# Altium PCB dAir-clove-0.0.0.2.PcbDoc
Units mm, origin at the board's own origin, x right, y up, seen from the top; angles counter-clockwise.
Board outline 78 x 78 mm, 2 copper layers (Top Layer, Bottom Layer); 72 components, 41 nets, 254 pads, 61 vias.
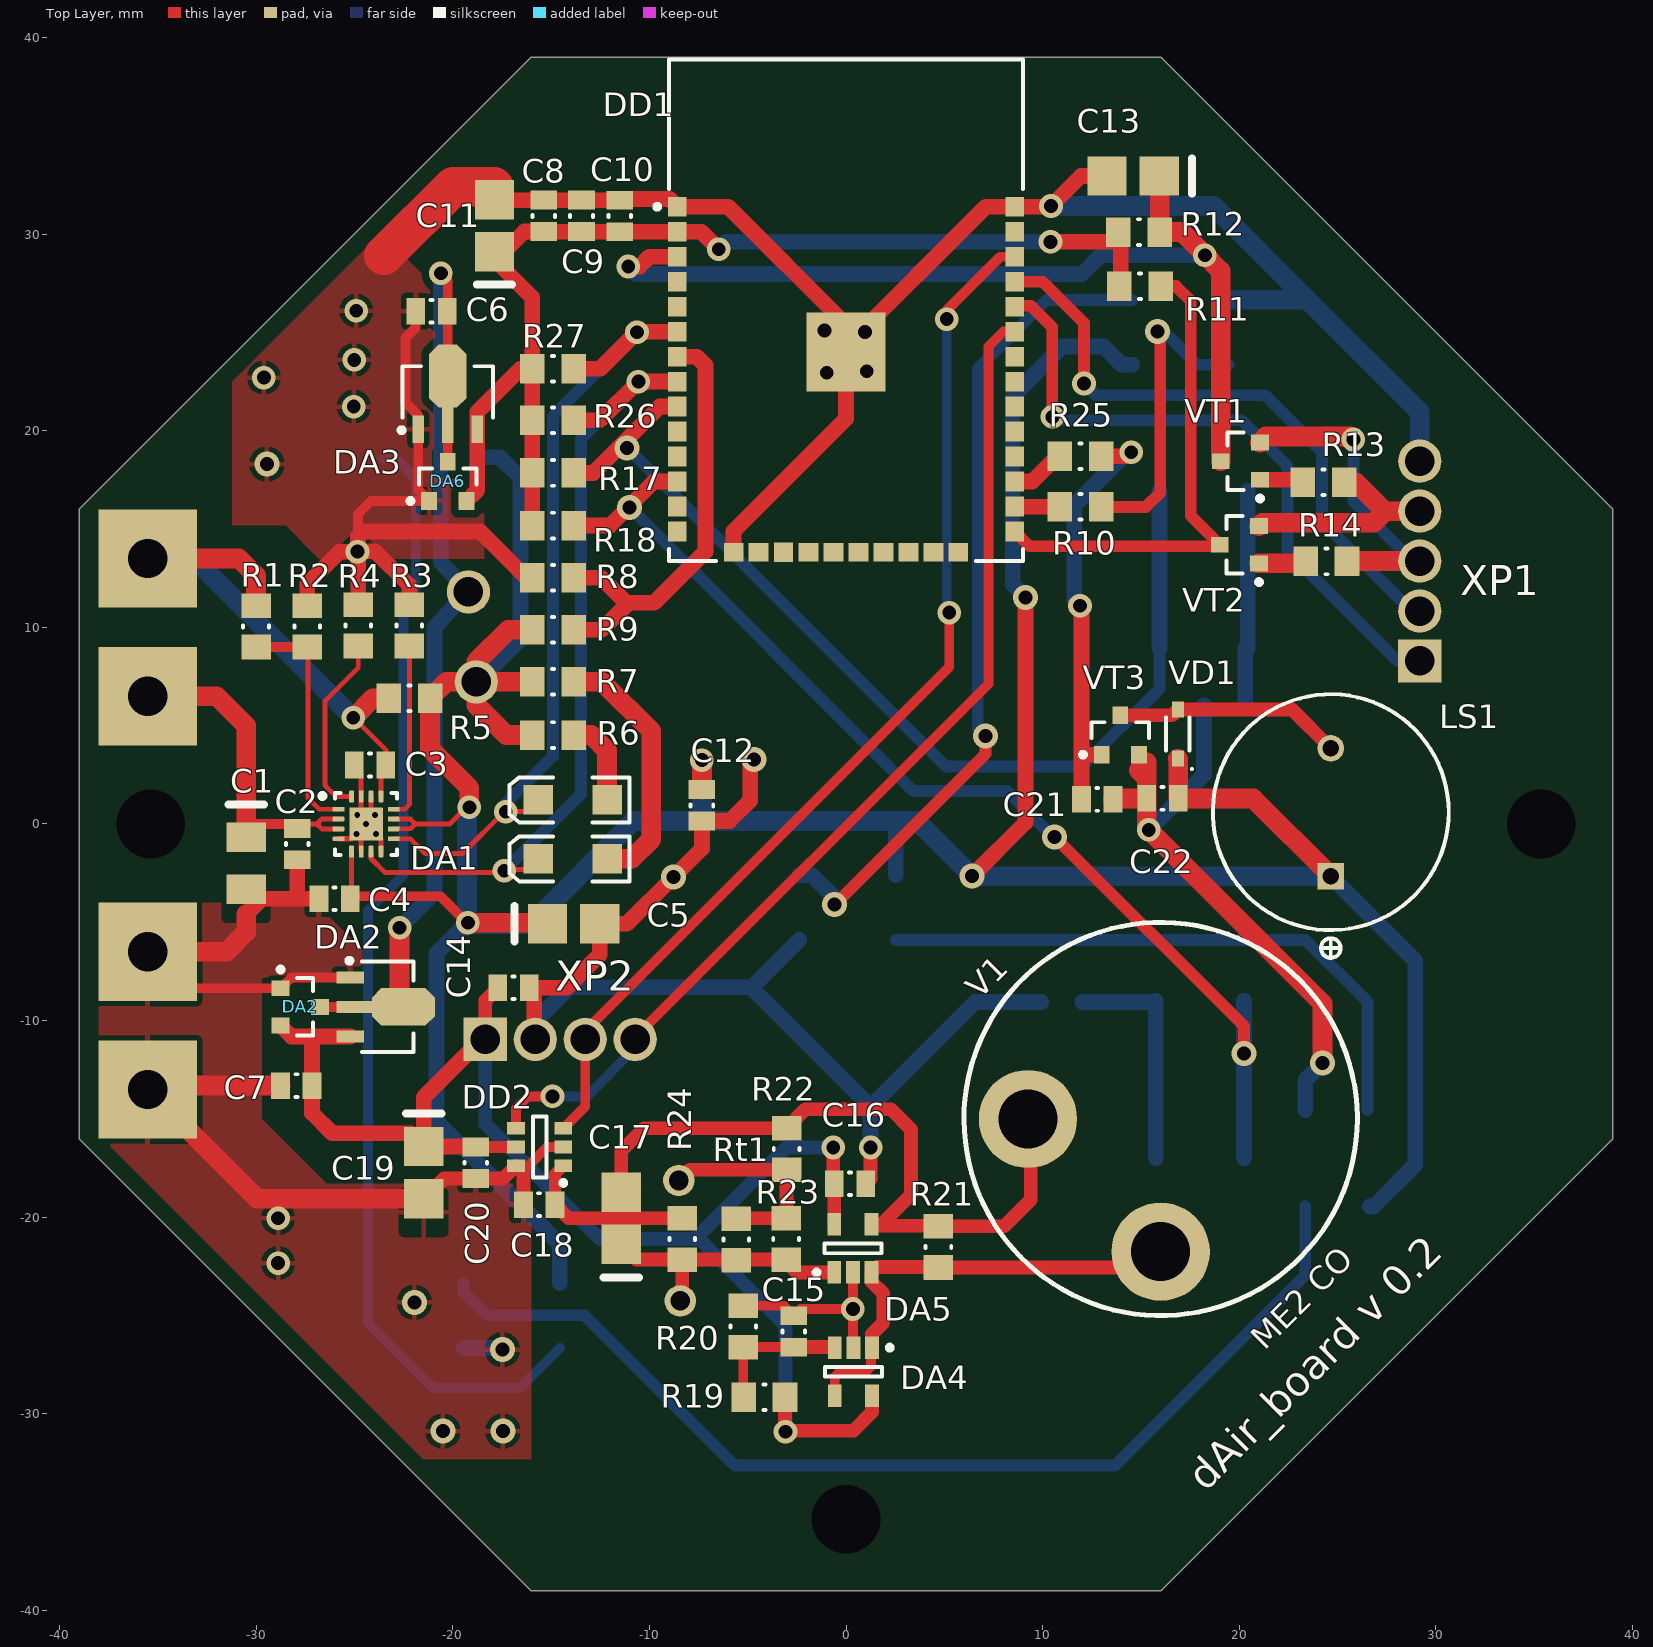
[diagram p0: Top Layer view]
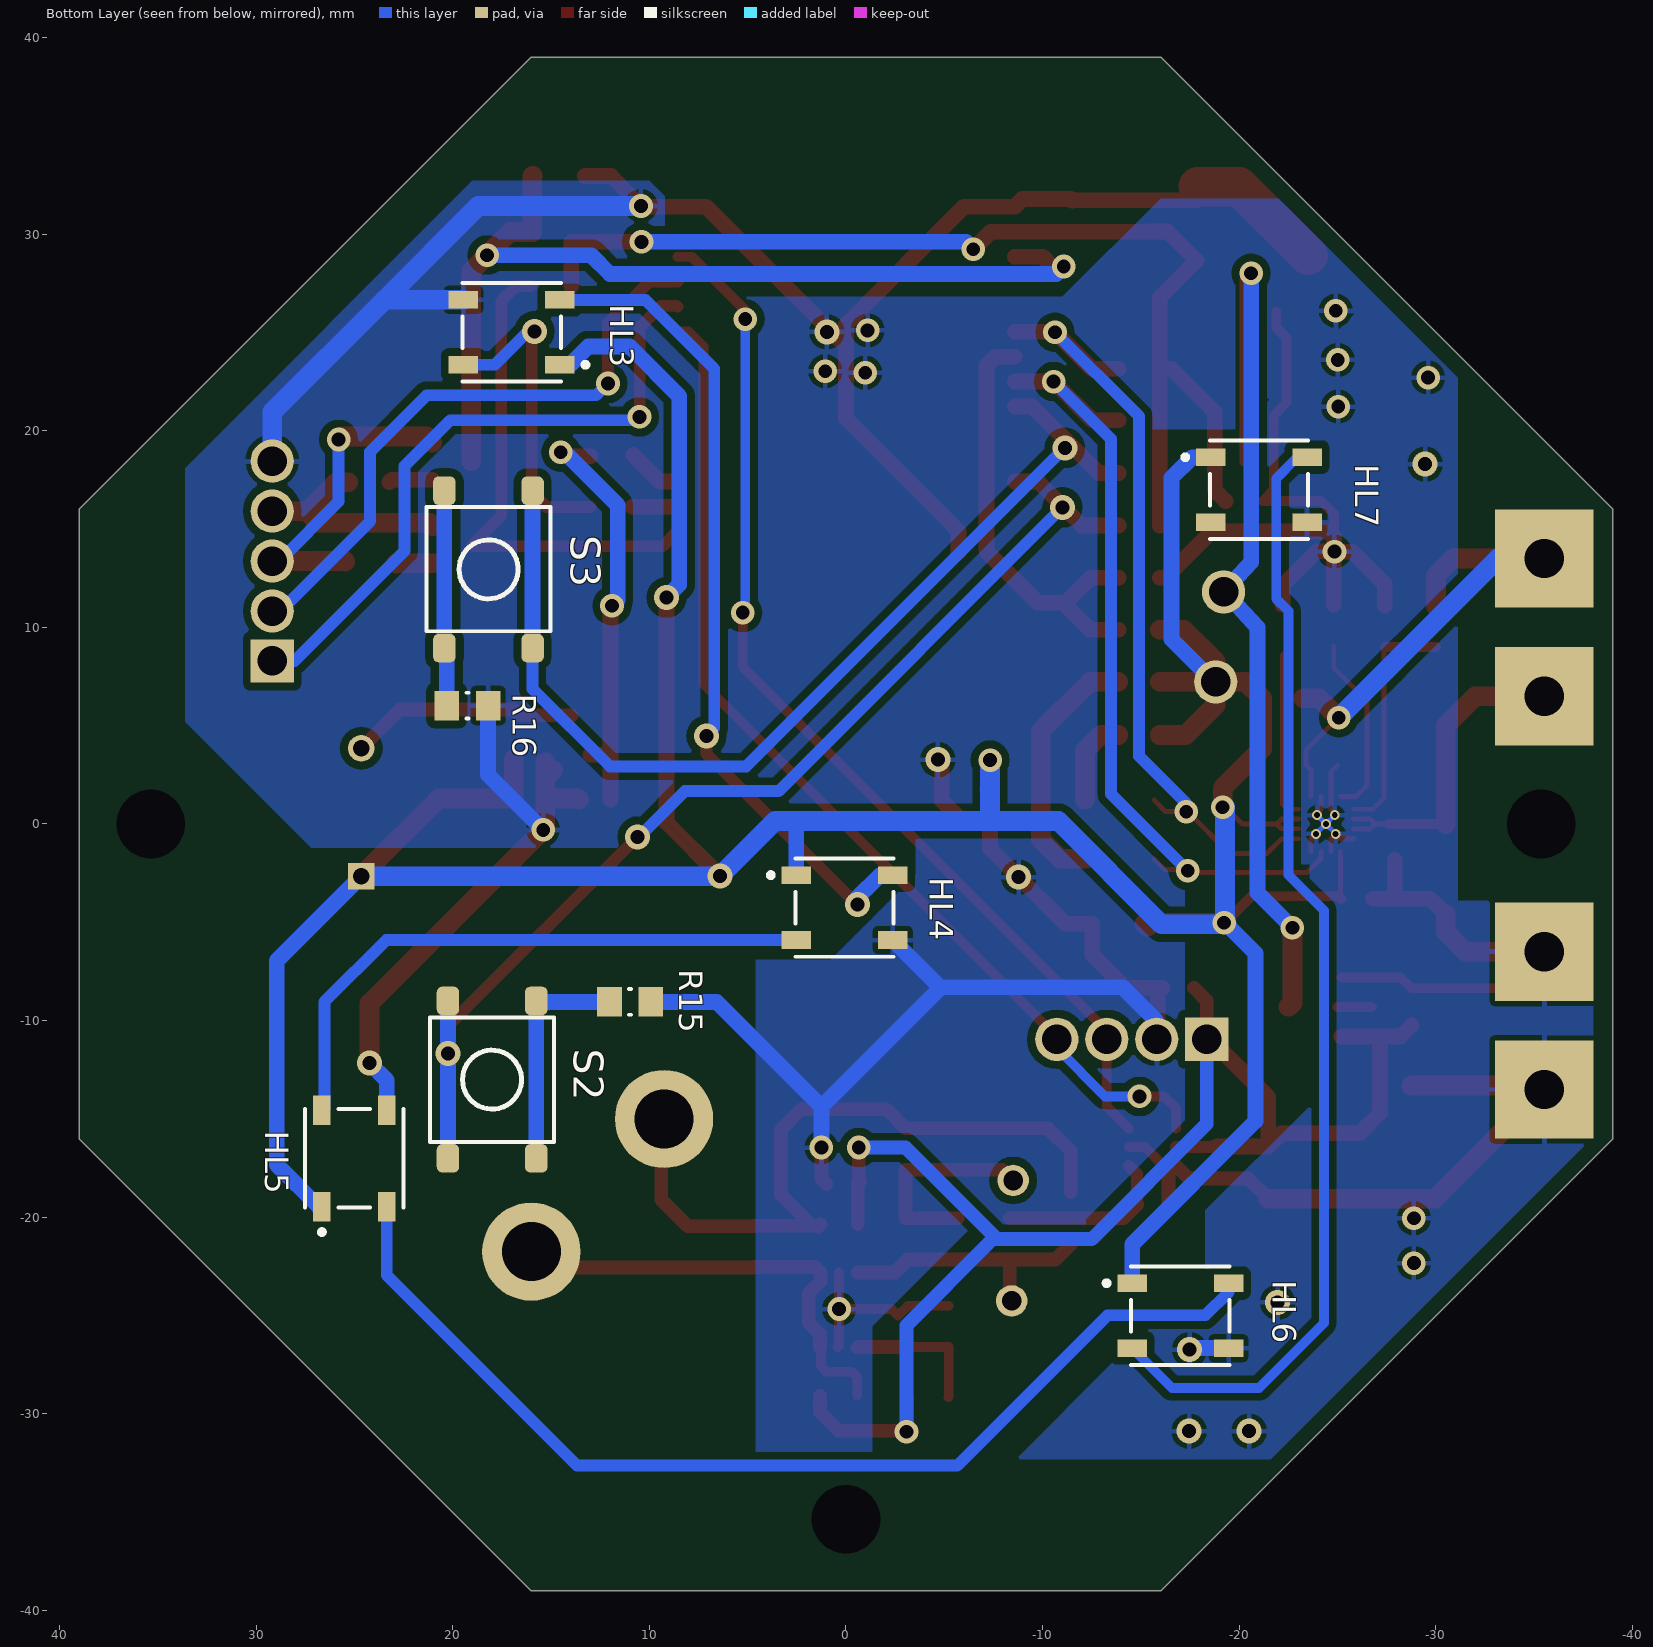
[diagram p1: Bottom Layer view, seen from below]
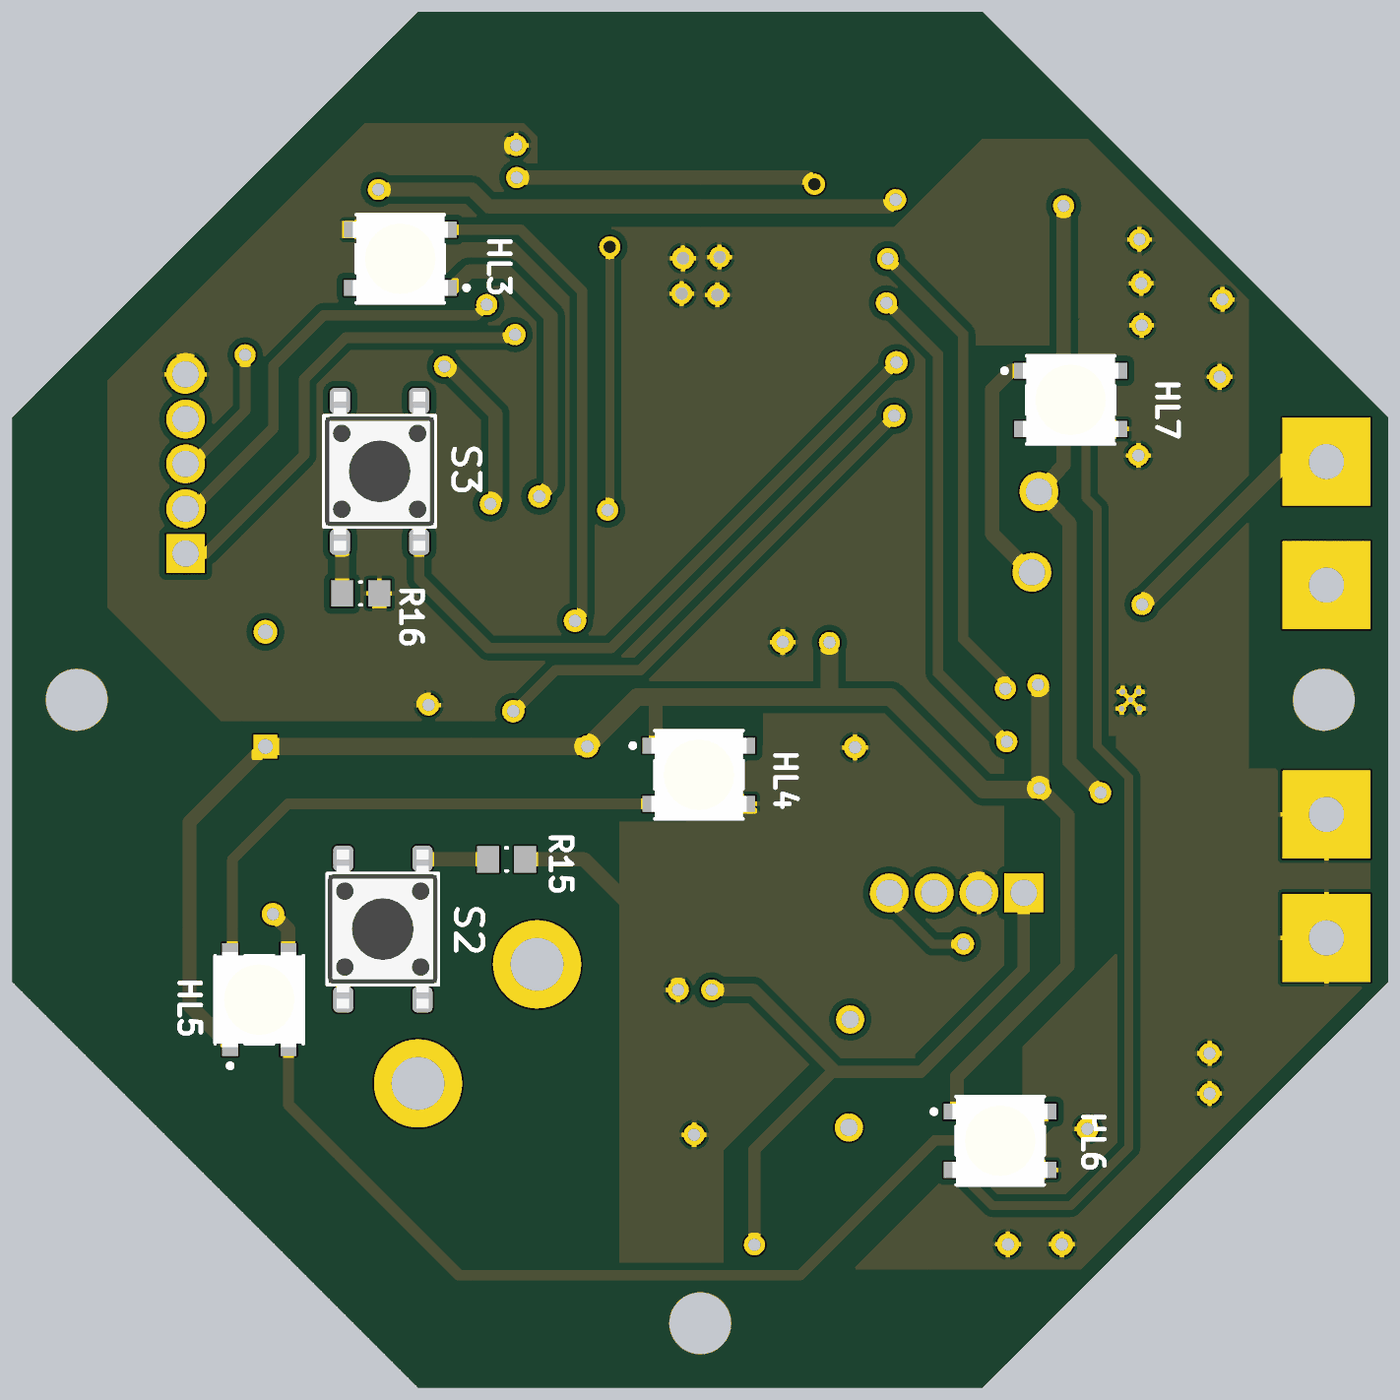
[diagram p2: 3D render of the assembled board from below, using the file's embedded part models]

## Layer stack, top to bottom
Top Solder: solder mask 0.0102, Solder Resist, Dk 3.5
Top Layer: signal copper 0.0356
Dielectric 1: dielectric 0.32, FR-4, Dk 4.8
Bottom Layer: signal copper 0.0356
Bottom Solder: solder mask 0.0102, Solder Resist, Dk 3.5

## Board outline
-16,-39 -39,-16 -39,16 -16,39 16,39 39,16 39,-16 16,-39

## Design rules (kind name [scope] priority, off if disabled: settings)
Clearance Polygons [InNet('GND')] p1: gap=0.4 ignorepadtopadclearanceinfootprint=FALSE
Clearance [All] p2: gap=0.254 ignorepadtopadclearanceinfootprint=FALSE
PolygonConnect [All] p1: connectstyle=Relief reliefconductorwidth=0.254 reliefentries=4 polygonreliefangle="90 Angle" airgapwidth=0.254
RoutingVias [All] p1: holewidth=0.711 width=1.27 viastyle="Through Hole" minholewidth=0.711 minwidth=1.27 maxholewidth=0.711 maxwidth=1.27
SolderMaskExpansion [All] p1: expansion=0.102
Width [All] p1: maxlimit=5 minlimit=0.2 preferedwidth=0.254
30 further rules are at their usual default settings.

## Classes and differential pairs
component class dAir: C1 C2 C3 C4 C5 C6 C7 C8 C9 C10 C11 C12 C13 C14 C15 C16 C17 C18 C19 C20 C21 C22 DA1 DA2 DA3 DA4 DA5 DD1 DD2 HL3 HL6 LS1 R1 R2 R3 R4 R5 R6 R7 R8 R9 R10 R11 R12 R13 R14 R17 R18 R19 R20 R21 R22 R23 R24 R25 R26 R27 Rt1 V1 VD1 VT1 VT2 VT3

## Components (designator, comment, footprint, x,y, rotation, side; value= is the part's Value field where it differs from the comment)
C1 "47uF" KEMT-A-3216-18-2_M#1 -30.5,-2 r270 top
C2 "4.7uF" CAPC0805(2012)155_L -27.9,-1.025 r270 top
C3 "1uF" CAPC0805(2012)155_L -24.2,3 r180 top value=4.7uF
C4 "4.7uF" CAPC0805(2012)155_L -26,-3.8 r180 top
C5 "47uF" KEMT-A-3216-18-2_M#2 -13.85,-5.075 r0 top
C6 "1uF" CAPC0805(2012)155_L -21.075,26.075 r0 top value=4.7uF
C7 "1uF" CAPC0805(2012)155_L -27.95,-13.3 r0 top value=4.7uF
C8 "1uF" CAPC0805(2012)155_L -15.375,30.925 r270 top value=4.7uF
C9 "1nF" CAPC0805(2012)155_L -13.45,30.925 r270 top value=4.7uF
C10 "0.1uF" CAPC0805(2012)155_L -11.5,30.915 r270 top value=4.7uF
C11 "100uF" KEMT-A-3216-18-2_M#2 -17.875,30.425 r90 top
C12 "0.1uF" CAPC0805(2012)155_L -7.325,0.95 r90 top value=4.7uF
C13 "0.1uF" KEMT-A-3216-18-2_M#2 14.6,32.95 r180 top
C14 "0.1uF" CAPC0805(2012)155_L -16.9,-8.325 r180 top value=4.7uF
C15 "0.1uF" CAPC0805(2012)155_L -2.65,-25.8 r270 top value=4.7uF
C16 "1uF" CAPC0805(2012)155_L 0.2,-18.3 r0 top value=4.7uF
C17 "47uF" KEMT-A-3216-18-2_M#2 -11.425,-20.05 r90 top
C18 "0.1uF" CAPC0805(2012)155_L -15.6,-19.35 r180 top value=4.7uF
C19 "10uF" KEMT-A-3216-18-2_M#2 -21.475,-17.725 r270 top
C20 "0.1uF" CAPC0805(2012)155_L -18.825,-17.225 r90 top value=4.7uF
C21 "100 nF" CAPC0805(2012)155_L 12.775,1.25 r0 top value=4.7uF
C22 "1mF" CAPC0805(2012)155_L 16.1,1.3 r180 top value=4.7uF
DA1 "BQ24075" RGT0016C_V -24.4,0 r0 top
DA2 "" ONSC-SOT-23-3-318-08_V -27.75,-9.3 r0 top
DA2 "HT7530" SOT89_N -23.3,-9.3 r0 top
DA3 "HT7530" SOT89_N -20.25,21.975 r90 top
DA4 "AD8603AUJ-REEL" ADI-UJ-5_M 0.375,-27.85 r270 top
DA5 "AD8603AUJ-REEL" ADI-UJ-5_M 0.35,-21.575 r90 top
DA6 "" ONSC-SOT-23-3-318-08_V -20.25,17.425 r90 top
DD1 "ESP-WROOM-32" OLMX-ESP-WROOM-32 0,22.605 r0 top
DD2 "MCP3421A2T-E/CH" SOT-23-CH6_L -15.575,-16.425 r180 top
HL3 "WS2812B" ADAI-WS2812B_V 17,25 r0 bottom
HL4 "WS2812B" ADAI-WS2812B_V 0.075,-4.25 r180 bottom
HL5 "WS2812B" ADAI-WS2812B_V 25,-17 r90 bottom (schematic designator HL7)
HL6 "WS2812B" ADAI-WS2812B_V -17,-25 r180 bottom
HL7 "WS2812B" ADAI-WS2812B_V -21,17 r180 bottom
LS1 "KPI1410(temporally)" CZCY-CY-12085G-5042-2_V 24.65,0.6 r90 top
R1 "1k" RESC0805(2012)_M -30,10.05 r270 top value="4.30 Ohm"
R2 "1k" RESC0805(2012)_M -27.4,10.05 r90 top value="4.30 Ohm"
R3 "1k" RESC0805(2012)_M -22.2,10.1 r90 top value="4.30 Ohm"
R4 "1k" RESC0805(2012)_M -24.8,10.1 r90 top value="4.30 Ohm"
R5 "0" RESC0805(2012)_M -22.2,6.4 r180 top value="4.30 Ohm"
R6 "1k" RESC0805(2012)_M -14.9,4.525 r0 top value="4.30 Ohm"
R7 "1k" RESC0805(2012)_M -14.9,7.225 r0 top value="4.30 Ohm"
R8 "470k" RESC0805(2012)_M -14.9,12.525 r0 top value="4.30 Ohm"
R9 "100k" RESC0805(2012)_M -14.9,9.875 r180 top value="4.30 Ohm"
R10 "470" RESC0805(2012)_M 11.925,16.125 r180 top value="4.30 Ohm"
R11 "10k" RESC0805(2012)_M 14.95,27.35 r180 top value="4.30 Ohm"
R12 "10k" RESC0805(2012)_M 14.9,30.1 r180 top value="4.30 Ohm"
R13 "10k" RESC0805(2012)_M 24.275,17.375 r0 top value="4.30 Ohm"
R14 "10k" RESC0805(2012)_M 24.425,13.35 r0 top value="4.30 Ohm"
R15 "1k" RESC0805(2012)_M 19.25,6.025 r0 bottom value="4.30 Ohm" (schematic designator R6)
R16 "1k" RESC0805(2012)_M 10.975,-9.05 r180 bottom value="4.30 Ohm" (schematic designator R6)
R17 "47k" RESC0805(2012)_M -14.9,17.85 r180 top value="4.30 Ohm"
R18 "47k" RESC0805(2012)_M -14.9,15.175 r180 top value="4.30 Ohm"
R19 "1M" RESC0805(2012)_M -4.15,-29.15 r0 top value="4.30 Ohm"
R20 "150k" RESC0805(2012)_M -5.225,-25.55 r270 top value="4.30 Ohm"
R21 "200" RESC0805(2012)_M 4.7,-21.5 r90 top value="4.30 Ohm"
R22 "120k" RESC0805(2012)_M -3.025,-16.525 r270 top value="4.30 Ohm"
R23 "100k" RESC0805(2012)_M -3.05,-21.1 r270 top value="4.30 Ohm"
R24 "100" RESC0805(2012)_M -8.325,-21.1 r90 top value="4.30 Ohm"
R25 "470" RESC0805(2012)_M 11.925,18.7 r180 top value="4.30 Ohm"
R26 "47k" RESC0805(2012)_M -14.9,20.525 r0 top value="4.30 Ohm"
R27 "47k" RESC0805(2012)_M -14.9,23.15 r0 top value="4.30 Ohm"
Rt1 "47k" RESC0805(2012)_M -5.575,-21.125 r270 top value="4.30 Ohm"
S2 "Comment" DIPT-DTSM-6_V 18.175,12.95 r270 bottom
S3 "Comment" DIPT-DTSM-6_V 18,-13 r90 bottom
V1 "ME2 CO" "ME2 CO" 16,-15 r0 top locked
VD1 "LL4148" INF-SOD323_V 16.875,4.575 r180 top
VT1 "bc847" ONSC-SOT-23-3-318-08_V 20.05,18.45 r180 top
VT2 "bc847" ONSC-SOT-23-3-318-08_V 20,14.2 r180 top
VT3 "" ONSC-SOT-23-3-318-08_V 13.95,4.525 r90 top

## Footprints (in the part's own frame and the unit in brackets; to place one, negate y for a bottom-side part, rotate by r counter-clockwise, add the part's x,y. Pads: shape width x height; smd on the part's side, far side on the other; paste and mask are expansions set on the pad)
ADAI-WS2812B_V [mm] "SMD, 4-Leads, Body 5x5mm, Pitch 3.3mm"
  rect 1.5x0.9 smd: 1(-2.45,1.65) 2(-2.45,-1.65) 3(2.45,-1.65) 4(2.45,1.65)
  silkscreen extent -3.87,-2.5 2.5,2.5, body extent -2.7,-2.5 2.7,2.5, height 1.69
ADI-UJ-5_M [mm] "SOT23, 5-Leads, Body 2.9x1.6mm, Pitch 0.95mm, IPC Low Density"
  rect 1.15x0.7 smd: 1(-1.225,0.95) 2(-1.225,0) 3(-1.225,-0.95) 4(1.225,-0.95) 5(1.225,0.95)
  silkscreen extent -1.35,-1.45 0.25,1.98, body extent -0.8,-1.45 0.8,1.45, height 1
CAPC0805(2012)155_L [mm] "Chip Capacitor, Body 2.0x1.2mm, Height 1.55mm, IPC High Density"
  rect 0.95x1.35 smd: 1(-0.8,0) 2(0.8,0)
  silkscreen extent -0.05,-0.57 0.05,0.57, body extent -1.1,-0.72 1.1,0.72, height 1.55
CZCY-CY-12085G-5042-2_V [mm] "Through-hole Buzzer, 2-Leads, Dia 12mm, Height 8.5mm"
  rect 1.35x1.35 hole 0.85: 1(-3.25,0)
  round 1.35 hole 0.85: 2(3.25,0)
  Mechanical 13 keep-out circle w0.1: c0,0 r6
  silkscreen extent -7.41,-6 6,6, body extent -6,-6 6,6, height 8.5
DIPT-DTSM-6_V [mm] "Switch, Through-Hole, 4 Leads, Body 8.5x8.5mm, Row Spacing 9.0mm, Pitch 4.5mm"
  rrect50% 1.448x1.143 smd: 1(4.01,-2.25) 2(-4,-2.25) 3(4.01,2.24) 4(-4,2.24)
  silkscreen extent -3.16,-3.16 3.15,3.15, body extent -4.5,-3.1 4.5,3.1, height 4.5
INF-SOD323_V [mm] "SOD, 2-Leads, Body 1.7x1.25 mm"
  rect 0.6x0.8 smd: 1(0,1.25) 2(0,-1.25)
  silkscreen extent -0.76,-0.85 0.6,1.83, body extent -0.63,-0.85 0.63,0.85, height 1.1
KEMT-A-3216-18-2_M#1 [mm] "Molded TAN Capacitor, 2-Leads, Body 3.4x1.8mm, IPC Low Density"
  rect 1.5x2 smd: 1(-1.325,0) 2(1.325,0)
  silkscreen extent -3,-0.9 -3,0.9, body extent -1.7,-0.9 1.7,0.9, height 1.8
KEMT-A-3216-18-2_M#2 [mm] "Molded TAN Capacitor, 2-Leads, Body 3.4x1.8mm, IPC Low Density"
  rect 2x2 smd: 1(-1.325,0) 2(1.325,0)
  silkscreen extent -3,-0.9 -3,0.9, body extent -1.7,-0.9 1.7,0.9, height 1.8
"ME2 CO" [mm]
  round 5 hole 3: 1(-6.75,0) 2(0,-6.75)
  silkscreen extent -10,-10 10,10
OLMX-ESP-WROOM-32 [mm] "SMD, 38-Leads, Body 18x25.5mm, Pitch 1.27mm"
  rect 0.95x1 smd: 1(-8.575,8.78) 2(-8.575,7.51) 3(-8.575,6.24) 4(-8.575,4.97) 5(-8.575,3.7) 6(-8.575,2.43) 7(-8.575,1.16) 8(-8.575,-0.11) 9(-8.575,-1.38) 10(-8.575,-2.65) 11(-8.575,-3.92) 12(-8.575,-5.19) 13(-8.575,-6.46) 14(-8.575,-7.73) 17(-3.175,-8.78) 25(8.575,-7.73) 26(8.575,-6.46) 27(8.575,-5.19) 28(8.575,-3.92) 29(8.575,-2.65) 30(8.575,-1.38) 31(8.575,-0.11) 32(8.575,1.16) 33(8.575,2.43) 34(8.575,3.7) 35(8.575,4.97) 36(8.575,6.24) 37(8.575,7.51) 38(8.575,8.78)
  rect 4x4 smd: 1(0,1.395)
  rect 1x0.95 smd: 15(-5.715,-8.78) 16(-4.445,-8.78) 18(-1.905,-8.78) 19(-0.635,-8.78) 20(0.635,-8.78) 21(1.905,-8.78) 22(3.175,-8.78) 23(4.445,-8.78) 24(5.715,-8.78)
  silkscreen extent -9.72,-9.23 9,16.27, body extent -9.04,-9.25 9.04,16.29, height 3.04
ONSC-SOT-23-3-318-08_V [mm] "SOT23, 3-Leads, Body 2.92x1.3mm, Pitch 0.95mm"
  rect 0.9x0.8 smd: 1(-1,0.95) 2(-1,-0.95) 3(1,0)
  silkscreen extent -1.12,-1.46 0.65,2.02, body extent -0.65,-1.46 0.65,1.46, height 1.11
RESC0805(2012)_M [mm] "Chip Resistor, Body 2.0x1.3mm, IPC Low Density"
  rect 1.25x1.5 smd: 1(-1.05,0) 2(1.05,0)
  silkscreen extent -0.05,-0.65 0.05,0.65, body extent -1.1,-0.67 1.1,0.67, height 0.7
RGT0016C_V [mm] "QFN, 16-Leads, Body 3x3mm, Pitch 0.5mm, Thermal Pad 1.65x1.65mm"
  rrect40% 0.6x0.25 smd: 1(-1.4,0.75) 2(-1.4,0.25) 3(-1.4,-0.25) 4(-1.4,-0.75) 9(1.4,-0.75) 10(1.4,-0.25) 11(1.4,0.25) 12(1.4,0.75)
  rrect40% 0.25x0.6 smd: 5(-0.75,-1.4) 6(-0.25,-1.4) 7(0.25,-1.4) 8(0.75,-1.4) 13(0.75,1.4) 14(0.25,1.4) 15(-0.25,1.4) 16(-0.75,1.4)
  rrect6% 1.7x1.7 smd paste-0.85: 17(0,0)
  rrect6% 1.55x1.55 on Top Paste: 17(0,0)
  silkscreen extent -2.35,-1.58 1.57,1.58, body extent -1.5,-1.5 1.5,1.5, height 1
SOT89_N [mm] "SOT89, 3-Leads, Body 4.5x2.4 mm, Pitch 1.5mm, Lead Span 4.1mm, IPC Medium Density"
  rect 1.4x0.6 smd: 1(-1.9,1.5) 3(-1.9,-1.5)
  rect 1.8x0.6 smd: 2(-1.7,0)
  oct 3.2x1.9 smd: 2(0.8,0)
  silkscreen extent -2.07,-2.3 1.3,2.47, body extent -1.3,-2.3 1.29,2.3, height 1.6
SOT-23-CH6_L [mm] "SOT23, 6-Leads, Body 2.9x1.7mm, Pitch 0.95mm, Lead Span 2.8mm, IPC High Density"
  rect 0.9x0.65 smd: 1(-1.2,0.95) 2(-1.2,0) 3(-1.2,-0.95) 4(1.2,-0.95) 5(1.2,0) 6(1.2,0.95)
  silkscreen extent -1.33,-1.55 0.35,1.95, body extent -0.9,-1.55 0.9,1.55, height 1.45

## Part data
C1 C5 C11 C13 C17 C19: library part CMP-2000-05172-1, Capacitance=10µF, ESR (Equivalent Series Resistance)=3.8Ohm, Lifetime @ Temp.=2000Hrs@85degC, Manufacturer=Kemet, Manufacturer Size Code=A, Operating Temperature=-55degC~125degC, Package / Case=1206(3216Metric), Package Description="2-Pin Surface Mount Device, Body 3.2 x 1.6 mm", Package Reference=1206, Standard Package=2,000, Tolerance=±10%, Voltage - Rated=10V, Catalog Drawings=T49x,T5xxSeries_A-side1T49x,T5xxSeries_A,B-side2T49x,T5xxSeries_A,SBottom, Category=Capacitors, Datasheet URL=http://www.farnell.com/datasheets/1824869.pdf, Datasheet Version=Apr-14, Family=TantalumCapacitors, Features=GeneralPurpose, Height - Seated (Max)="0.071\"(1.80mm)", Lead Spacing=-, Manufacturer URL=http://www.kemet.com/, Mounting Type=SurfaceMount, Online Catalog=T491Series, Other Names=399-3684-2, Packaging=Tape&Reel(TR), Product Training Modules=CapacitorBasics-TypicalUsesforCapacitorsDeratingGuidelinesforSurfaceMountTantalumCapacitors, Series=T491, Size / Dimension="0.126\"Lx0.063\"W(3.20mmx1.60mm)", Type=Molded
C2 C3 C4 C6 C7 C8 C9 C10 C12 C14 C15 C16 C18 C20: library part CMP-1036-04882-1, "CAP 4.7uF 10V ±10% 0805 (2012 Metric) Thickness 1.55mm SMD", Case-EIA=0805, Case-Metric=2012, Rated Voltage="10 V", Tolerance=A±10%, Max Thickness="1.55 mm", Technology=SMT
C21 C22: library part CMP-1036-04882-1, "CAP 4.7uF 10V ±10% 0805 (2012  Thickness 1.55mm SMD", Case-EIA=0805, Case-Metric=2012, Rated Voltage="10 V", Tolerance=A±10%, Max Thickness="1.55 mm", Technology=SMT
DA1: library part CMP-0321-00238-2, "USB-Friendly Li-Ion Battery Charger and Power-Path Management IC, Vout 5.5 V, 4.3 V, -40 to 85 degC, 16-pin QFN (RGT), Green (RoHS & no Sb/Br)", Manufacturer="Texas Instruments", Over Voltage Protection=N, PartNumber=BQ24075RGTR, Code_JEDEC=MO-220, ComponentLink1Description=Datasheet, ComponentLink1URL=http://www.ti.com/general/docs/lit/getliterature.tsp?genericPartNumber=BQ24075&fileType=pdf, DatasheetVersion=SLUS810G, Eco-Plan="Green (RoHS & no Sb/Br)", Lead Acid=N, Li-Ion=N, Li-Polymer=N, Mounting Technology="Surface Mount", NiCd=N, NiMH=N, PackageDescription="16-Pin Plastic Quad Flat No-Lead, 3 x 3 mm Body, 0.5 mm Pitch, 1.7 x 1.7 mm Exposed Pad", PackageReference=RGT0016C, PackageVersion="revH, Oct-2011", SubFamily="Battery Charge Management", Vin(Min)(V)=4.3
DA2 DA6 VT1 VT2 VT3: library part CMP-1048-00737-1, "General Purpose Transistor, NPN Silicon, 3-Pin SOT-23, Pb-Free, Tape and Reel", Manufacturer="On Semiconductor", PartNumber=BC817-25LT1G, ComponentLink1Description="Manufacturer URL", ComponentLink1URL=http://www.onsemi.com/, ComponentLink2Description=Datasheet, ComponentLink2URL=http://www.onsemi.com/pub_link/Collateral/BC817-16LT1-D.PDF, ComponentLink3Description="Package Specification", ComponentLink3URL=http://www.onsemi.cn/pub_link/Collateral/318-08.PDF, DatasheetVersion="Rev. 12", fT Min (MHz)=100, IC Continuous (A)=0.5, Mounting Technology="Surface Mount", PackageDescription="3-Pin Small Outline Transistor, Body 2.92 x 1.3 mm, Pitch 0.95 mm", PackageReference=SOT-23-3-318-08, PackageVersion="Rev. AP, 11/2009", Packing="Tape and Reel", Polarity=NPN, RoHS=TRUE
DA2 DA3: library part CMP-0204-00106-1, "100mA Low Power LDO, Output Voltage 3.0V, SOT89 Pkg", Code_IPC=SOT89, DatasheetVersion="Rev1.80, Mar-2010", PackageDescription="3-Pin SOT-89 Package 1.5 mm Pitch, 4.1 mm Lead Span", PackageReference=SOT89, PackageVersion=May-2010
DA4 DA5: library part CMP-0384-02070-2, "Single Channel Single-Supply Operation Operational Amplifier, 400 KHz BW, 100 mV/us SR, Industrial, 5-pin SOT23 (UJ-5), Reel", Amplifiers Per Package=1, Generic Part Number=AD8603, Input Bias Current=200fA, Input Offset Voltage=12uV, Manufacturer="Analog Devices", Code_JEDEC=MO-193-AB, ComponentLink1Description="Manufacturer URL", ComponentLink1URL=http://www.analog.com/en/index.html, ComponentLink2Description=Datasheet, ComponentLink2URL=http://www.analog.com/static/imported-files/data_sheets/AD8603_8607_8609.pdf, ComponentLink3Description="Package Specification", ComponentLink3URL=http:/www.analog.com/static/imported-files/packages/PKG_PDF/TSOT(UJ)/UJ_5.pdf, ComponentLink4Description="Reference Circuit", ComponentLink4URL=http://www.analog.com/en/all-operational-amplifiers-op-amps/operational-amplifiers-op-amps/ad8603/products/product.html#product-recommendations, DatasheetVersion="Rev. C", Iq/Amp=50uA, Mounting Technology="Surface Mount", PackageDescription="5-Pin Thin Small Outline Transistor Package, Body 2.9 x 1.6 mm, Pitch 0.95 mm", PackageReference=UJ-5, PackageVersion=100708-A, PartNumber=AD8603AUJ-REEL, RevisionNote="Reference Circuit URL fixed", Slew Rate=100mV/us, Small Signal Bandwidth=400KHz, V Span Max=6V, V Span Min=1.8V
DD1: library part CMP-2000-07454-1, "Espressif System, 2.7 to 3.6 V, -40 to 85 degC, 38-Pin SMD", Manufacturer=Olimex, Package Description="38-Pin Surface Mount Device, Body 18 x 25.5 mm, Pitch 1.27 mm", Datasheet URL=http://www.espressif.com/sites/default/files/documentation/esp-wroom-32_datasheet_en.pdf, Datasheet Version="Rev. 2.1, 09/2017", Manufacturer URL=https://www.olimex.com, Mounting Technology=SurfaceMount, Package Reference=ESP-WROOM-32, RoHSCompliant=false
DD2: library part CMP-0188-00097-2, "18-Bit Analog-to-Digital Converter with I2C Interface and On-Board Reference, 6-Pin SOT-23, Extended Temperature, Tape and Reel", Code_IPC=SOT26A-6, ComponentLink1Description="Manufacturer URL", ComponentLink1URL=http://www.microchip.com/, ComponentLink2Description=Datasheet, ComponentLink2URL=http://ww1.microchip.com/downloads/en/DeviceDoc/22003e.pdf, ComponentLink3Description="Package Specification", ComponentLink3URL=http://www.microchip.com/stellent/groups/techpub_sg/documents/packagingspec/en012702.pdf, DatasheetVersion="revE, Aug-2009", PackageDescription="6-Lead Plastic Small Outline Transistor (CH) [SOT-23]", PackageReference=SOT-23-CH6, PackageVersion="revBB, Aug-2009", RevisionNote="URLs added."
HL3 HL4 HL5 HL6 HL7: library part CMP-1740-00005-1, "Intelligent Control LED Integrated Light Source, 3.5 to 5.3 V, -25 to 80 degC, 4-Pin SMD, RoHS, Bulk", Case\Package=Radial, Current Rating="240 mA", Max Operating Temperature="125 degC", Min Operating Temperature="-55 degC", Package Quantity=200, Tolerance=10%, ComponentLink1Description="Manufacturer URL", ComponentLink1URL=https://www.adafruit.com/, ComponentLink2Description=Datasheet, ComponentLink2URL=https://cdn-shop.adafruit.com/datasheets/WS2812B.pdf, DatasheetVersion=May-13, Height="12.2 mm", Lead Pitch="5 mm", Length="12.2 mm", Mount="Through Hole", PackageDescription="4-Pin Surface Mount Device, Body 5 x 5 mm, Pitch 3.3 mm", PackageReference=WS2812B, Packaging=Bulk, Pins=2, Radiation Hardening=No, REACH SVHC="No SVHC", RoHSCompliant=true, Shielding=Unshielded
LS1: library part CMP-1019-00001-1, "Buzzer, 5 V, 42 Ohm, -20 to 70 degC, 2-Pin THD, Dia 12 mm, Height 8.5 mm, RoHS, Tray", Current Consumption (Max.)="35 mA", Manufacturer="Changzhou Chaoyin", Operating Temperature Range="-20 to 70 degC", Oscillation Frequency="2.048 KHz", PartNumber=cy-12085G-5042, Rated Voltage="5 V", Resistance Value="42 +/- 4 Ohm", Mounting Technology="Through Hole", PackageDescription="2-Pin Through-hole Buzzer, Dia 12 mm, Height 8.5 mm", PackageReference=CY-12085G-5042, Packing=Tray, RoHS=TRUE, Sound Pressure Level (Min.)="85 dB"
R1 R2 R3 R4 R5 R6 R7 R8 R9 R10 R11 R12 R13 R14 R15 R16 R17 R18 R19 R20 R21 R22 R23 R24 R25 R26 R27 Rt1: library part CMP-1013-00017-1, Case-EIA=0805, Case-Metric=2012, Power="0.125 W", Tolerance="5 %", Technology=SMT
VD1: library part CMP-1182-00006-1, "Silicon Schottky Diode, SOD323, Reel, Green", Manufacturer=Infineon, PartNumber="BAT 54-03W E6327", ComponentLink1Description="Manufacturer URL", ComponentLink1URL=http://www.infineon.com/, ComponentLink2Description=Datasheet, ComponentLink2URL=http://www.infineon.com/dgdl/bat54series.pdf?folderId=db3a30431400ef68011425f1ca2505e3&fileId=db3a304314dca3890115190b74210ea6, ComponentLink3Description="Package Specification", ComponentLink3URL=http://www.infineon.com/dgdl/SOD323-Package_Overview.pdf?folderId=db3a30431936bc4b011952aab84f3bbe&fileId=db3a30431936bc4b011952beed653be3, Green=TRUE, Mounting Technology="Surface Mount", PackageDescription="2-Pin Small Outline Diode Package, 1.25 x 1.7 mm Body", PackageReference=SOD323, Packing=Reel, RevisionNote="Lost Devices pt2"

## Free pads (board coordinates)
  rect 5x5 hole 2: 1(-35.5,-13.5) 2(-35.5,-6.5) 2(-35.5,6.5) 2(-35.5,13.5)
  rect 2.2x2.2 hole 1.5: 1(-18.34,-10.95) 1(29.175,8.29)
  rect 1.5x1.5 smd: 1(-12.15,-1.775) 1(-12.15,1.225) 2(-15.65,-1.775) 2(-15.65,1.225)
  round 2.2 hole 1.5: 2(-15.8,-10.95) 2(29.175,10.83) 3(-13.26,-10.95) 3(29.175,13.37) 4(-10.72,-10.95) 4(29.175,15.91) 5(29.175,18.45) 13(-18.8,7.225) 14(-19.2,11.8)
  round 0 hole 3.5: 9(-35.35,0) 9(0,-35.35) 9(35.35,0)
  round 1.6 hole 1: 15(-8.425,-24.25) 16(-8.5,-18.125)

## Via types
v1: diameter 1.2, hole 0.7, Top Layer to Bottom Layer, 38 vias
v2: diameter 1.27, hole 0.711, Top Layer to Bottom Layer, 18 vias
v3: diameter 0.5, hole 0.3, Top Layer to Bottom Layer, 5 vias

## Nets (pads, with @x,y where several pads share a name; then routed paths per layer and width w, separated by ;. In a path a pad name is that pad's centre, name@x,y a point inside that pad or via, vN(x,y) a via of type N, cw(c..) or ccw(c..) an arc to the next point about the centre after c; other vN are vias at no path point)
3V: C7.2 C14.2 C16.1 C19.1 C20.2 DA2.2@-28.75,-10.25 DA2.3@-25.2,-10.8 DA4.5 DA5.5 DD2.5 pad.1@-18.34,-10.95 R19.2 | length 77.6
  Top Layer w0.6: C20.2@-18.85,-16.4 C20.2 DD2.5
  Top Layer w0.7: pad.1@-18.34,-10.95 -18.34,-8.965 C14.2 ; R19.2 -3.1,-30.85 0.375,-30.85 1.325,-29.9 DA4.5 ; v1(-0.65,-16.451) -0.65,-18.1 -0.725,-18.175 C16.1 DA5.5
  Top Layer w0.8: DA2.2@-28.75,-10.25 -28.2,-10.8 -27.15,-10.8 ; DA2.3@-25.2,-10.8 -27.15,-10.8 ; C20.2@-18.85,-16.4 C19.1 ; pad.1@-18.34,-10.95 -18.525,-10.95 -21.475,-13.9 C19.1 ; -27.15,-10.8 C7.2 -27.15,-14.7 -26.125,-15.725 -22.15,-15.725 C19.1
  Bottom Layer w0.7: pad.1@-18.34,-10.95 -18.34,-15.26 -12.5,-21.1 -7.675,-21.1 -3.026,-16.451 v1(-0.65,-16.451) ; -7.337,-21.237 -3.075,-25.5 v1(-3.075,-30.9)
5V: C3.1 DA1.13 pad.2@-35.5,13.5 R1.1 R5.2 | length 28.2
  Top Layer w0.254: v1(-25.05,5.4) -25.025,5.4 -23.4,3.775 C3.1 -23.65,2.75 DA1.13
  Top Layer w1: pad.2@-35.5,13.5 -30.875,13.5 -30,12.625 R1.1 ; v1(-25.05,5.4) -24.05,6.4 R5.2
  Bottom Layer w1: pad.2@-35.5,13.5 -33.15,13.5 v1(-25.05,5.4)
+E: C4.1 C5.1 C12.2 C22.1 DA1.5 DA1.10 DA1.11 HL3.1 HL4.1 HL5.1 HL6.1 HL7.1 LS1.1 pad.13 R5.1 R6.1 R7.1 R9.2 VD1.1 | length 200.2
  Top Layer w0.25: DA1.5 -25.15,-3.75 -25.075,-3.675 C4.1@-25.063,-3.662 ; DA1.10@-23,-0.243 -22.143,-0.243 -21.9,0 ; DA1.11 -22.15,0.25 -21.9,0 ; v1(-19.15,0.85) -19.3,0.85 -20.15,0 -21.9,0
  Top Layer w0.5: C4.1 C4.1@-25.15,-3.75 ; C4.1@-25.075,-3.675 -20.625,-3.675 v1@-19.275,-5.025 ; v1@-19.475,-5.225 v1@-19.275,-5.025 ; v1(-19.225,-5.025) v1@-19.275,-5.025
  Top Layer w0.8: v2(6.4,-2.65) 9.125,0.075 v2(9.125,11.525)
  Top Layer w1: v1(-19.225,-5.025) -15.575,-5.025 -15.55,-5 -15.325,-5.225 C5.1 ; v1(-19.15,0.85) -19.15,1.825 -21.15,3.825 R5.1 -20.325,7.225 pad.13 ; R6.1 -17.275,4.525 -18.8,6.05 pad.13 ; R7.1 pad.13 ; R9.2 -17.175,9.875 -18.8,8.25 pad.13 ; C12.2 -7.3,1.775 -7.325,1.8 v1(-7.325,3.25) ; VD1.1 16.9,3.3 C22.1 20.7,1.3 LS1.1
  Bottom Layer w0.8: v1(-19.225,-5.025) -19.275,-5.025 -19.35,-5.1 -20.825,-6.575 -20.825,-15.1 -14.55,-21.375 HL6.1 ; pad.13@-18.725,7.225 -16.55,9.4 -16.55,17.6 -17.6,18.65 HL7.1 ; 1.675,0.1 1.725,0.15 ; HL4.1 2.525,0.15 ; v2(9.125,11.525) 8.475,12.175 8.475,21.75 11,24.275 13.1,24.275 14.025,23.35 HL3.1 ; LS1.1 28.95,-6.95 28.95,-17.325 26.825,-19.45 HL5.1
  Bottom Layer w1: v1@-19.35,-5.1 -16.05,-5.1 -10.8,0.15 1.725,0.15 2.525,0.15 3.6,0.15 v2(6.4,-2.65) LS1.1 ; v1@-19.275,-4.85 v1@-19.275,0.85 ; pad.13 pad.13@-18.725,7.225 ; -7.325,0.225 v1(-7.325,3.25)
GND: C1.2 C2.2 C3.2 C4.2 C5.2 C6.1 C7.1 C8.1 C9.1 C10.1 C11.2 C12.1 C13.2 C14.1 C15.1 C16.2 C18.2 C19.2 C20.1 C21.2 C22.2 DA1.4 DA1.6 DA1.8 DA1.14 DA1.15 DA1.17@-24.4,0 DA2.1 DA3.1 DA4.2 DA5.2 DA6.1 DD1.1 DD1.15 DD1.38 DD2.2 DD2.6 HL3.3 HL4.3 HL5.3 HL6.3 HL7.3 pad.1@-35.5,-13.5 pad.2@-15.8,-10.95 pad.2@-35.5,-6.5 pad.5 R2.2 R3.2 R4.2 R8.1 R15.1 R16.2 R20.1 VT3.2 | length 296.8
  Top Layer w0.256: DA1.4 -25.15,-0.75 v3(-24.9,-0.5) -24.65,-0.75 DA1.6 ; C3.2 -24.65,2.65 DA1.15 -24.65,0.75 -24.85,0.55 v3(-24.85,0.45) ; DA1.14 -24.15,0.75 -23.95,0.55 v3(-23.95,0.45) ; v3(-23.9,-0.5) -23.65,-0.75 DA1.8
  Top Layer w0.5: pad.2@-35.5,-6.5 -33.65,-8.35 -28.75,-8.35 -28.2,-7.8 DA2.1@-25.2,-7.8 ; -24.813,14.637 -24.813,15.762 -24.15,16.425 DA6.1 -21.75,16.975 DA3.1 -21.75,20.775 -22.4,21.425 -22.4,24.725 -21.875,25.25 C6.1 ; DD2.6 -16.15,-17.375 -15.2,-16.425 DD2.2 ; R20.1 -3.15,-24.5 C15.1 -2.313,-24.663 v1(0.35,-24.663) ; DA5.2 v1(0.35,-24.663) ; DA4.2@0.425,-26.6 0.35,-26.525 v1(0.35,-24.663)
  Top Layer w0.7: C19.2 -20.45,-18.025 C20.1 -17.425,-18.025 DD2.6 -16.4,-17.75 C18.2 ; C16.2 1.25,-18.05 v1(1.25,-16.45)
  Top Layer w0.8: -30.5,-4.6 -29.7,-3.8 -27.85,-3.8 ; C2.2 -27.9,-3.75 -27.85,-3.8 ; R2.2 -27.4,12.2 -25.75,13.85 v1(-24.837,13.85) v1@-24.813,13.875 ; C4.2 -27.85,-3.8 ; R4.2 v1@-24.8,13.813 ; R3.2 -22.2,12.125 -23.95,13.875 v1@-24.813,13.875 ; C11.2 -17.84,31.715 C10.1 ; R8.1 -16.25,12.525 -18.6,14.875 -24.575,14.875 -24.813,14.637 v1@-24.813,13.875 ; pad.2@-15.8,-10.95 -15.85,-10.9 -15.85,-8.575 C14.1 -14.2,-8.325 -12.525,-6.65 C5.2 -11.15,-5.075 v2(-8.775,-2.7) -7.325,-1.25 C12.1 -5.925,0.15 -4.875,1.2 -4.875,3.075 v2(-4.675,3.275) ; C10.1@-11.5,31.7 -11.425,31.775 -8.965,31.775 -8.575,31.385 -5.985,31.385 0,25.4 DD1.1@0,24.275 ; DD1.15 -5.715,14.885 0,20.6 0,24 DD1.1@0,24.275 ; C13.2 11.95,32.95 v1(10.425,31.425) 10.385,31.385 DD1.38 7.11,31.385 DD1.1@0,24.275
  Top Layer w1: pad.2@-35.5,-6.5 -31.5,-6.5 -30.5,-5.5 -30.5,-4.6 ; C7.1 -35.3,-13.3 -35.5,-13.5 -29.95,-19.05 C19.2 ; C21.2 13.625,1.3 C22.2 ; 14.9,2.725 15.3,2.325 ; 15.3,3.125 C22.2 ; v2(24.225,-12.15) 24.225,-9.125 v1(15.4,-0.3) 15.3,-0.2 C22.2
  Top Layer w2: -23.503,28.903 -19.971,32.408 C11.2@-17.9,32.4
  Bottom Layer w0.256: v3(-24.9,-0.5) v3(-24.4,0) ; v3(-24.85,0.45) v3(-24.4,0) ; v3(-23.95,0.45) v3(-24.4,0) ; v3(-23.9,-0.5) v3(-24.4,0)
  Bottom Layer w0.8: HL6.3 -17.55,-26.65 v2(-17.475,-26.725) ; pad.2@-15.75,-10.975 -15.75,-9.975 -14.075,-8.3 -4.775,-8.3 ; HL4.3 -4.775,-8.3 ; v1(1.25,-16.45) 1.25,-14.375 ; R16.2 6.575,-9.05 1.25,-14.375 ; v1(15.4,-0.3) 18.2,2.5 R15.1 ; HL5.3 23.35,-13.025 v2(24.225,-12.15) ; -4.775,-8.3 -4.8,-8.325 1.25,-14.375
  Bottom Layer w1: v1(10.425,31.425) 18.7,31.425 23.475,26.65 ; HL3.3 23.475,26.65 ; pad.5 29.175,20.95 23.475,26.65
  other v1: -28.875,-22.325 -28.875,-20.05 -25.025,21.225 -29.6,22.7 -0.975,22.95 1.05,23.025 -25,23.6 -1.1,25.1 -24.9,26.1
  other v2: -20.5,-30.875 -17.45,-30.875 -21.95,-24.325 -29.45,18.3 0.975,25.025
NetBAT1_1: C1.1 C2.1 DA1.2 DA1.3 pad.2@-35.5,6.5 | length 16.6
  Top Layer w0.254: C2.1@-27.6,0 -26.9,0 ; DA1.3@-25.8,-0.244 -26.656,-0.244 -26.9,0 ; DA1.2 -26.65,0.25 -26.9,0
  Top Layer w0.5: C1.1@-30.5,0 C2.1@-27.6,0
  Top Layer w1: pad.2@-35.5,6.5 -32,6.5 -30.5,5 C1.1@-30.5,0
NetC6_2: C6.2 DA2.2@-22.5,-9.3 DA2.2@-25,-9.3 DA2.3@-26.75,-9.3 DA3.2 DA6.3 pad.14 | length 50.8
  Top Layer w0.5: DA2.3@-26.75,-9.3 DA2.2@-25,-9.3 ; v1(-20.6,28) -20.25,27.65 DA6.3
  Top Layer w1: v1(-22.7,-5.275) -22.7,-9.1 DA2.2@-22.5,-9.3
  Bottom Layer w0.8: v1(-22.7,-5.275) -20.925,-3.5 -20.925,9.999 -19.238,11.835 -20.6,13.317 v1(-20.6,28)
NetC13_1: C13.1 DD1.3 R12.1 VT1.3 | length 49
  Top Layer w0.8: v1(-11.075,28.35) -10.5,28.35 -10.005,28.845 DD1.3
  Top Layer w1: C13.1 15.95,32.925 R12.1 17.075,30.1 v1(18.25,28.925) 19.05,28.125 VT1.3
  Bottom Layer w0.8: v1(-11.075,28.35) -10.696,27.971 11.996,27.971 12.95,28.925 v1(18.25,28.925)
NetC15_2: C15.2 DA4.3 R19.1 R20.2 | length 7.2
  Top Layer w0.5: R19.1 -5.225,-29.125 R20.2 C15.2
  Top Layer w0.7: C15.2 -0.6,-26.6 DA4.3
NetC17_1: C17.1 DA5.1 pad.15 R23.2 R24.1 Rt1.2 | length 13.6
  Top Layer w0.7: C17.1 -10.65,-22.15 R24.1 ; pad.15@-8.45,-24.225 pad.15 -8.325,-24.15 R24.1 ; DA5.1 -2.5,-22.8 -3.15,-22.15 R24.1
NetC17_2: C17.2 DA5.4 R21.2 R22.1 V1.1 | length 36.5
  Top Layer w0.7: C17.2 -11.425,-16.625 -10.275,-15.475 R22.1 -2.051,-14.501 2.276,-14.501 3.3,-15.525 3.3,-18.85 1.725,-20.425 ; DA5.4 1.375,-20.425 DA5.4@1.45,-20.425 ; DA5.4@1.412,-20.463 DA5.4@1.45,-20.425 ; V1.1@9.4,-15 9.4,-19.1 8.05,-20.45 R21.2 4.7,-20.425 1.725,-20.425 ; DA5.4@1.45,-20.425 1.725,-20.425
NetC18_1: C18.1 DD2.1 R24.2 | length 8.9
  Top Layer w0.6: C18.1 -14.8,-17.8 DD2.1
  Top Layer w0.7: C18.1 -14.1,-20.05 R24.2
NetC21_1: C21.1 R25.1 VT3.1 | length 21.9
  Top Layer w0.8: C21.1 v1@11.975,11.1 ; 11.975,3.525 VT3.1 ; R25.1 14.225,18.7 14.5,18.975 v1(14.5,18.9)
  Bottom Layer w0.8: v1(11.9,11.1) 11.612,11.388 11.612,16.212 14.4,19 v1(14.5,18.9)
NetDA1_1: DA1.1 R1.2 R2.1 | length 12.1
  Top Layer w0.25: R2.1 -27.364,8.964 -27.364,1.325 -26.789,0.75 DA1.1
  Top Layer w0.5: R1.2 R2.1
NetDA1_7: DA1.7 DD1.8 pad.2@-15.65,-1.775 R26.2 | length 43.2
  Top Layer w0.254: DA1.7 -24.15,-1.758 -23.433,-2.475 v1@-17.375,-2.475 ; v1(-17.375,-2.375) -17.375,-2.325 -16.2,-2.325 pad.2@-15.65,-1.775
  Top Layer w0.8: R26.2 -12.525,20.525 v1(-10.555,22.495) DD1.8
  Bottom Layer w0.6: v1(-17.375,-2.375) -13.475,1.525 -13.475,19.575 v1(-10.555,22.495)
NetDA1_9: DA1.9 DD1.6 pad.2@-15.65,1.225 R27.2 | length 42
  Top Layer w0.254: DA1.9 -22.15,-0.75 -21.4,-1.5 -19.5,-1.5 -17.375,0.625 v1(-17.3,0.625) -16.25,0.625 pad.2@-15.65,1.225
  Top Layer w0.8: R27.2 -12.5,23.15 -10.615,25.035 DD1.6
  Bottom Layer w0.6: v1(-17.3,0.625) -17.3,1.05 -14.9,3.45 -14.9,20.725 v1(-10.625,25)
NetDA1_12: DA1.12 R3.1 | length 8.7
  Top Layer w0.25: DA1.12 -22.427,0.75 -22.2,0.978 -22.2,8.6 R3.1@-22.3,8.7
NetDA1_16: DA1.16 R4.1 | length 9.4
  Top Layer w0.25: DA1.16 -25.925,1.4 -26.5,1.975 -26.5,6.25 -24.8,7.95 R4.1
NetDA4_1: DA4.1 DA4.4 DA5.3 R21.1 V1.2 | length 23.5
  Top Layer w0.5: DA4.4 -0.575,-28.125 -0.3,-27.85 1,-27.85 1.275,-27.575 1.275,-26.675 DA4.1
  Top Layer w0.7: DA4.1 1.325,-25.925 1.9,-25.35 1.9,-23.875 1.3,-23.275 DA5.3 1.575,-22.525 R21.1@4.7,-22.525 ; R21.1 15.2,-22.55 V1.2
NetDD1_7: DD1.7 R8.2 R9.1 | length 22.7
  Top Layer w0.8: R9.1 -12.425,9.875 -11.175,11.125 -11.175,11.25 ; R8.2 -12.45,12.525 -11.175,11.25 ; DD1.7 -7.59,23.765 -7.15,23.325 -7.15,13.85 -9.75,11.25 -11.175,11.25
NetDD1_9: DD1.9 R17.1 S2.3 S2.4 | length 52.2
  Top Layer w0.8: R17.1 -12.85,17.85 -9.475,21.225 DD1.9
  Bottom Layer w0.6: v2(-11.125,19.125) 5.075,2.925 12,2.925 15.935,6.86 S2.3
  Bottom Layer w0.8: S2.3 S2.4
NetDD1_12: DD1.12 R18.1 S3.3 S3.4 | length 57.8
  Top Layer w0.6: v2(10.6,-0.65) 20.24,-10.29 v2(20.24,-11.675)
  Top Layer w0.8: R18.1 -12,15.175 -9.76,17.415 DD1.12
  Bottom Layer w0.6: v2(-11,16.1) 3.425,1.675 8.2,1.675 10.525,-0.65 v2(10.6,-0.65)
  Bottom Layer w0.8: S3.4 v2(20.24,-11.675) S3.3
NetDD1_25: DD1.25 R11.1 VT2.3 | length 25.5
  Top Layer w0.6: DD1.25 9.325,14.125 18.925,14.125 VT2.3 ; R11.1 16.775,27.35 17.525,26.6 17.525,15.675 VT2.3@18.925,14.275
NetDD1_26: DD1.26 R10.2 | length 2.3
  Top Layer w0.8: DD1.26 8.595,16.125 R10.2
NetDD1_27: DD1.27 R25.2 | length 2.8
  Top Layer w0.8: DD1.27 9.465,17.415 R25.2@10.812,18.762
NetDD1_33: DD1.33 DD2.4 pad.4@-10.72,-10.95 | length 53.1
  Top Layer w0.5: DD2.4 -16.775,-14.45 -16.175,-13.85 v1(-14.925,-13.85) ; pad.4@-10.72,-10.95 -10.72,-10.845 7.25,7.125 7.25,24.275 8.01,25.035 DD1.33
  Bottom Layer w0.5: v1(-14.925,-13.85) -13.175,-13.85 -10.72,-11.395 pad.4@-10.72,-10.95
NetDD1_34: DD1.34 pad.1@29.175,8.29 | length 33.3
  Top Layer w0.6: DD1.34 8.62,26.35 9.4,26.35 10.438,25.312 10.487,25.262 10.487,20.712 v1(10.5,20.7)
  Bottom Layer w0.6: v1(10.5,20.7) 10.675,20.525 20.125,20.525 22.45,18.2 22.45,13.875 28.035,8.29 pad.1@29.175,8.29
NetDD1_35: DD1.35 pad.2@29.175,10.83 | length 31.4
  Top Layer w0.6: DD1.35 10,27.575 12.1,25.475 v1(12.1,22.4)
  Bottom Layer w0.6: v1(12.1,22.4) 12.11,22.4 12.71,21.8 21.325,21.8 24.2,18.925 24.2,15.4 28.77,10.83 pad.2@29.175,10.83
NetDD1_36: DD1.36 DD2.3 pad.3@-13.26,-10.95 | length 54.4
  Top Layer w0.5: DD2.3 -13.26,-14.36 -13.26,-10.95 -13.26,-10.535 5.25,7.975 v1(5.25,10.75) ; v1(5.125,25.675) 5.125,26.125 7.845,28.845 DD1.36
  Bottom Layer w0.5: v1(5.125,25.675) 5.125,10.875 v1(5.25,10.75)
NetHL1_1: pad.1@-12.15,-1.775 R7.2 | length 13.1
  Top Layer w1: R7.2 -12.4,7.225 -9.9,4.725 -9.9,-0.775 -10.9,-1.775 pad.1@-12.15,-1.775
NetHL2_1: pad.1@-12.15,1.225 R6.2 | length 4.5
  Top Layer w1: R6.2 -12.95,4.525 -12.15,3.725 pad.1@-12.15,1.225
NetHL3_2: HL3.2 HL4.4 | length 42.5
  Top Layer w0.6: v2(-0.575,-4.1) 7.1,3.575 v2(7.1,4.475)
  Bottom Layer w0.6: v2(7.1,4.475) 6.7,4.875 6.7,23.15 10.2,26.65 HL3.2
  Bottom Layer w0.8: HL4.4 -1.725,-2.6 -0.575,-3.75 v2(-0.575,-4.1)
NetHL3_4: HL3.4 R10.1 | length 15.9
  Top Layer w0.6: R10.1 15.25,16.125 15.975,16.85 15.975,24.95 15.875,25.05 v2(15.85,25.05)
  Bottom Layer w0.6: v2(15.85,25.05) 16.15,25.05 17.85,23.35 HL3.4
NetLS1_2: LS1.2 VD1.2 VT3.3 | length 11.6
  Top Layer w0.7: VT3.3 16.575,5.525 VD1.2 22.675,5.825 LS1.2
NetR13_1: R13.1 VT1.1 | length 2.2
  Top Layer w0.8: VT1.1 23.1,17.5 R13.1
NetR13_2: pad.4@29.175,15.91 R13.2 VT2.2 | length 11.2
  Top Layer w1: VT2.2 21.175,15.325 26.85,15.325 27.413,15.887 27.39,15.91 ; R13.2 25.925,17.375 27.39,15.91 ; pad.4@29.175,15.91 27.39,15.91
NetR14_1: R14.1 VT2.1 | length 1.9
  Top Layer w1: VT2.1 R14.1@22.875,13.25
NetR14_2: pad.3@29.175,13.37 R14.2 VT1.2 | length 16.4
  Top Layer w1: VT1.2 21.35,19.7 25.65,19.7 v1(25.8,19.55) ; R14.2 25.495,13.37 pad.3@29.175,13.37
  Bottom Layer w0.6: v1(25.8,19.55) 25.8,16.4 28.83,13.37 pad.3@29.175,13.37
NetR15_2: 
NetR16_2: 
NetR22_2: pad.16 R22.2 R23.1 Rt1.1 | length 10.8
  Top Layer w0.7: pad.16 -7.95,-17.575 R22.2 -3.025,-20.025 R23.1 Rt1.1@-5.675,-20.05
"V ESP": C8.2 C9.2 C10.2 C11.1 DA3.3 DA6.2 DD1.2 R11.2 R12.2 R17.2 R18.2 R26.1 R27.1 | length 57.9
  Top Layer w0.8: DA6.2 -18.75,16.975 DA3.3 -18.75,20.95 -16.55,23.15 R27.1 ; R18.2 R17.2 R27.1 ; v1(-6.475,29.225) -7.365,30.115 DD1.2 C10.2 -15.365,30.115 C8.2 -16.35,30.125 -17.825,28.65 -15.95,26.775 R27.1 ; v1(10.4,29.6) 13.975,29.6 R11.2@13.975,27.35
  Bottom Layer w0.8: v1(-6.475,29.225) -6.1,29.6 v1(10.4,29.6)
pads on no net: DA1.17@-24.4,0 DD1.4 DD1.5 DD1.10 DD1.11 DD1.13 DD1.14 DD1.16 DD1.17 DD1.18 DD1.19 DD1.20 DD1.21 DD1.22 DD1.23 DD1.24 DD1.28 DD1.29 DD1.30 DD1.31 DD1.32 DD1.37 HL4.2 HL5.2 HL5.4 HL6.2 HL6.4 HL7.2 HL7.4 R15.2 R16.1 S2.1 S2.2 S3.1 S3.2
copper on no net: | length 165.8
  Bottom Layer w0.5: -23.525,18.575 -22.875,18.575 -21.875,17.575 -21.875,11.45 -22.5,10.825 -22.5,-2.6 -24.3,-4.4 -24.3,-25.375 -21,-28.675 -16.575,-28.675 -14.55,-26.65
  Bottom Layer w0.6: -19.45,-23.35 -19.45,-23.8 -18.275,-24.975 -13.3,-24.975 -5.65,-32.625 13.675,-32.625 23.35,-22.95 23.35,-19.45 ; 2.525,-5.9 23.375,-5.9 26.519,-9.044 26.519,-14.55
  Bottom Layer w0.8: 12.025,-9.05 15.75,-9.05 ; 15.75,-17 15.75,-8.99 ; 20.3,6.025 20.3,8.94 ; 20.425,8.94 20.425,16.95

## Polygon pours and split planes (outlines as drawn)
GND on Top Layer "Polygon top 2" (solid, remove dead copper, pour order 4): -16,-32.3 -16,-19.1 -16.8,-18.3 -26.4,-18.3 -26.6,-18.1 -29.7,-15 -29.7,-7.9 -29.6,-7.8 -25.2,-7.8 -24.6,-7.2 -24.6,-6.4 -27,-4 -37.9,-4 -38,-4.1 -38,-16 -37.8,-16 -21.5,-32.3
GND on Top Layer "Polygon top" (solid, remove dead copper, pour order 2): -23.65,30.05 -31.2,22.5 -31.2,15.2 -28.5,15.2 -26.8,13.5 -18.4,13.5 -18.4,24.8
GND on Bottom Layer "Top Layer-No Net" (solid, remove dead copper, pour order 0): -26.868,26.932 -20.011,20.075 -15.5,20.075 -15.5,18.6 -16.5,17.6 -19.588,17.6 -19.588,19.652 -26.868,26.932 -31.1,22.7 -31.1,-3.9 -38,-3.9 -38,-15.9 -21.6,-32.3 -8.659,-32.3 -18.275,-22.645 -18.275,-19.65 -23.675,-14.25 -23.572,-2.05 -17.225,-2.05 -17.225,-15.072 -12.187,-20.11 -12.187,-20.344 -6.531,-20.344 -1.325,-25.55 -1.325,-32.3 4.6,-32.3 4.6,-24.7 4.6,-6.909 0.784,-6.909 -1.45,-4.675 -3.55,-2.575 -3.55,-0.775 4.375,-0.775 4.75,-1.2 27.2,-1.2 28.8,0.4 33.6,5.2 33.6,18.1 19,32.7 10,32.7 9.225,31.925 9.225,26.8 -11,26.8 -16,31.8 -22,31.8

## Keep-outs
Mechanical 1:
  the board outline again, w2

## Silkscreen, mask and mechanical layers (free items; w line width, h text height)
Top Overlay:
  lines w0.2: -14.9,-2.925 -16.6,-2.925 -17.1,-2.525 -17.1,-1.025 -16.6,-0.625 -14.9,-0.625 ; -14.9,0.075 -16.6,0.075 -17.1,0.475 -17.1,1.975 -16.6,2.375 -14.9,2.375 ; -12.9,-2.925 -11,-2.925 -11,-0.625 -12.9,-0.625 ; -12.9,0.075 -11,0.075 -11,2.375 -12.9,2.375
  text "XP1" at 31.225,11.625 h1.52
  text "XP2" at -14.775,-8.475 h1.52
  text "dAir_board v 0.2" at 18.3,-34 h1.52 r45
Mechanical 1:
  circle w0.254: c0,0 r35.501
  circle w0.254: c0,0 r34
  lines w1.2: -39,-16 -39,16 -16,39 16,39 39,16 39,-16 16,-39 -16,-39 -39,-16